# EAGLE board attsys (EAGLE 8.1.0)
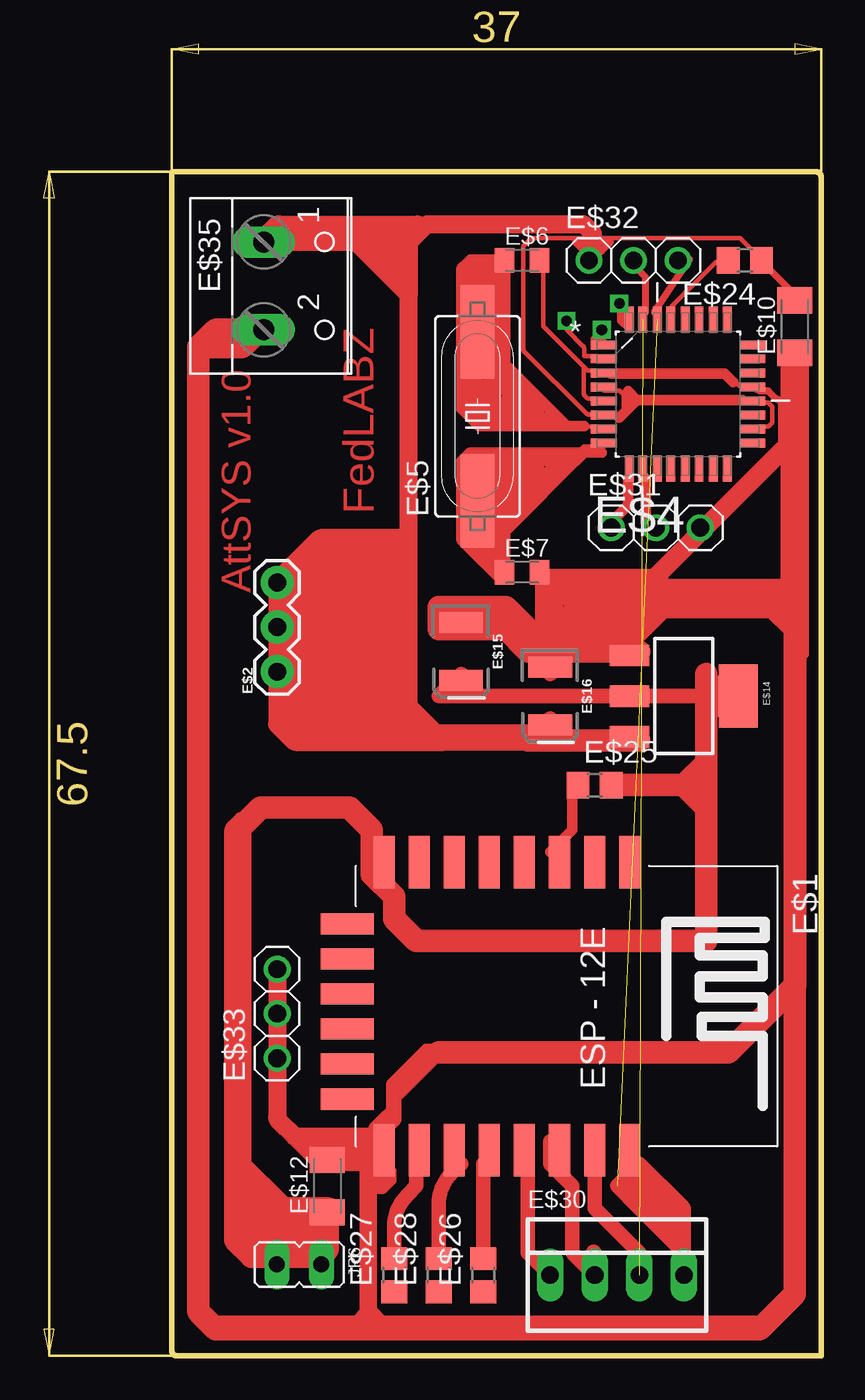
[diagram p0: board, top side]

Size 37 x 67.5 mm. Coordinates in mm from the lower left corner, seen from the top.
Outline: 0,67.5 36.75,67.5 arc-90 37,67.25 37,0 0.25,0 arc-90 0,0.25 0,67.5
Copper layers (1*16): Top 0.035mm / dielectric 1.5mm / Bottom 0.035mm
Design rules "default": minimum track width 10mil, minimum drill 24mil, track to track 8mil, track to pad 8mil, pad to pad 8mil, via to via 8mil, smd to smd 8mil, copper to edge 40mil, drill to drill 8mil, minimum pad ring 10mil, minimum via ring 8mil, stop-mask expansion 4mil, vias tented up to drill 0mil, thermal gap 10mil

## Footprints (pad centres in the part's own frame; a part is rotated, then mirrored left to right if it is on the bottom)
ESP12E-SMD = smd 3 x 1.2: ADC -8.3,3.8; CH_PD -8.3,1.8; GND 8.1,-8.2; GPIO0 8.1,-2.2; GPIO2 8.1,-4.2; GPIO4 8.1,-0.2; GPIO5 8.1,1.8; GPIO12 -8.3,-4.2; GPIO13 -8.3,-6.2; GPIO14 -8.3,-2.2; GPIO15 8.1,-6.2; GPIO16 -8.3,-0.2; RESET -8.3,5.8; RXD0 8.1,3.8; TXD0 8.1,5.8; VCC -8.3,-8.2 | smd 1.2 x 3: CS0 -4.8,-10.3; GPIO9 -0.8,-10.3; GPIO10 1.2,-10.3; MISO -2.8,-10.3; MOSI 3.2,-10.3; SCLK 5.2,-10.3
1X03 = drill 1.016 pad 1.88: 1 0,0; 2 2.54,0; 3 5.08,0
QFP80P900X900X120-32N = smd 1.473 x 0.508: 1 -4.242,2.794; 2 -4.242,2.007; 3 -4.242,1.194; 4 -4.242,0.406; 5 -4.242,-0.406; 6 -4.242,-1.194; 7 -4.242,-2.007; 8 -4.242,-2.794; 17 4.242,-2.794; 18 4.242,-2.007; 19 4.242,-1.194; 20 4.242,-0.406; 21 4.242,0.406; 22 4.242,1.194; 23 4.242,2.007; 24 4.242,2.794 | smd 0.508 x 1.473: 9 -2.794,-4.242; 10 -2.007,-4.242; 11 -1.194,-4.242; 12 -0.406,-4.242; 13 0.406,-4.242; 14 1.194,-4.242; 15 2.007,-4.242; 16 2.794,-4.242; 25 2.794,4.242; 26 2.007,4.242; 27 1.194,4.242; 28 0.406,4.242; 29 -0.406,4.242; 30 -1.194,4.242; 31 -2.007,4.242; 32 -2.794,4.242
HC49UP = smd 5.334 x 1.93: 1 -4.826,0; 2 4.826,0
C0805K = smd 1.1 x 1.4: 1 -1,0; 2 1,0
C1206K = smd 1.5 x 2: 1 -1.5,0; 2 1.5,0
SOT223 = smd 1.219 x 2.235: 1 -2.311,-3.099; 2 0,-3.099; 3 2.311,-3.099 | smd 3.6 x 2.2: 4 0,3.099
EIA3528 = smd 1.2 x 2.5: A 1.65,0; C -1.65,0
R0805 = smd 1.3 x 1.5: 1 -0.95,0; 2 0.95,0
22-23-2041 = drill 1 long: 1 -3.81,0; 2 -1.27,0; 3 1.27,0; 4 3.81,0
1X03' = drill 1.016: 1 -2.54,0; 2 0,0; 3 2.54,0
W237-102 = drill 1.194 long: 1 -2.5,-1.27; 2 2.5,-1.27
JP1 = drill 0.914 long: 1 0,-1.27; 2 0,1.27

## Placement (x,y rotation side)
DRILEGEND  [DRILEGEND]  -3.72,-6.76 0 top  (outside the outline)
E$1  [ESP12E-SMD]  20.29,19.83 270 top
E$2  [1X03]  6,39 90 top
E$4  [QFP80P900X900X120-32N]  28.85,54.83 0 top
E$5  [HC49UP]  17.42,53.56 90 top
E$6  [C0805K]  19.96,62.45 0 top
E$7  [C0805K]  19.96,44.67 0 top
E$10  [C1206K]  35.5,58.68 90 top
E$12  [C1206K]  8.86,9.67 90 top
E$14  [SOT223]  29.18,37.61 270 top
E$15  [EIA3528]  16.48,40.15 270 top
E$16  [EIA3528]  21.56,37.61 270 top
E$24  [R0805]  32.66,62.45 180 top
E$25  [R0805]  24.1,32.53 0 top
E$26  [R0805]  17.75,4.59 90 top
E$27  [R0805]  12.67,4.59 90 top
E$28  [R0805]  15.21,4.59 90 top
E$30  [22-23-2041]  25.37,4.59 0 top
E$31  [1X03']  27.58,47.21 0 top
E$32  [1X03']  26.31,62.45 0 top
E$33  [1X03']  6,19.5 90 top
E$35  [W237-102]  6.5,61 270 top
JP6  [JP1]  7.25,5.2 270 top

## Library data of the parts
DRILEGEND = drilegend
E$1 = esp8266modules
E$2 = SparkFun-Electromechanical
E$4 = Atmel-ATMEGA328P-AU
E$5-E$7 E$10 E$12 E$31-E$33 = adafruit
E$14 = SparkFun-IC-Power
E$15 E$16 = SparkFun-Capacitors
E$24-E$28 = eagle-ltspice
E$30 = con-molex
E$35 = con-wago-500
JP6 = jumper

## Nets
S$1: E$26.1
S$2: E$14.4
S$3: E$1.GPIO15
S$4: E$1.GPIO2
S$5: E$1.GPIO0
S$6: E$25.1
S$7: E$27.1
S$8: E$1.VCC
S$9: E$15.C
S$10: E$1.GND
S$11: E$27.2
S$12: E$28.2
S$13: E$28.1
S$14: E$1.CH_PD
S$15: E$15.A
S$16: E$14.2
S$17: E$25.2
S$18: E$16.C
S$26: E$30.1
S$29: E$4.30 E$30.4
S$31: E$4.8 E$5.1 E$7.1
S$32: E$4.7 E$5.2 E$6.1
S$33: E$4.3 E$4.5 E$4.21 E$6.2 E$7.2
S$34: E$4.4 E$4.6 E$4.18 E$4.20 E$24.1
S$35: E$4.29 E$24.2
S$36: E$4.31 E$30.3
S$37: E$30.2
VCC: JP6.1 JP6.2

## Tracks (layer width: path | path; a pad name or v marks a point on that pad's centre or on a via)
S$1
  Top 0.254: 17.75,3.57 E$26.1
S$2
  Top 0.254: 32.15,37.63 E$14.4
S$3
  Top 0.254: 13.86,10.89 13.86,11.57 E$1.GPIO15
S$4
  Top 0.254: 15.92,11.57 E$1.GPIO2
S$5
  Top 0.254: 17.75,11.35 17.98,11.57 E$1.GPIO0
S$6
  Top 0.254: 23.01,32.38 E$25.1
S$7
  Top 0.254: 12.72,3.57 E$27.1 12.49,3.8
S$8
  Top 0.254: 12.26,28.95 12.26,28.26 E$1.VCC 12.26,28.03 12.26,27.35
S$9
  Top 0.254: 16.61,41.75 E$15.C 16.38,41.75
S$10
  Top 0.254: 12.03,11.57 E$1.GND 12.03,11.8
S$11
  Top 0.254: 12.72,5.63 E$27.2
S$12
  Top 0.254: 15.23,5.63 E$28.2
S$13
  Top 0.254: 15.23,3.8 E$28.1
S$14
  Top 0.254: 22.09,28.26 E$1.CH_PD
S$15
  Top 0.254: 16.61,38.32 E$15.A 16.38,38.32
S$16
  Top 0.254: 25.98,37.41 E$14.2 26.21,37.63
S$17
  Top 0.254: 24.84,32.61 E$25.2
S$18
  Top 0.254: 21.64,39.46 E$16.C 21.41,39.46
S$19
  Top 0.61: 21.56,28.72 22.76,29.92 arc45 22.83,30.09 22.83,32.53
S$20
  Top 0.813: 25.37,37.61 16.48,37.61 | 16.48,37.61 16.48,38.88 15.21,37.61 16.48,37.61
S$21
  Top 0.813: 25.37,35.07 21.56,35.07 | 21.56,35.07 21.56,36.34 20.29,35.07 21.56,35.07
  Top 1.27: 20.29,35.07 25.37,35.07 26.64,35.07
S$22
  Top 0.813: 26.64,37.61 30.45,37.61 | 30.45,37.61 31.72,37.61 | 31.72,37.61 30.45,38.88 30.45,37.61 | 30.45,37.61 30.45,36.34 | 30.45,36.34 31.72,37.61 | 30.45,36.34 30.45,33.8
  Top 1.27: 30.45,38.88 30.45,33.8 | 29.18,32.53 30.45,31.26 | 30.45,31.26 30.45,23.64 13.94,23.64 12.67,24.91 12.67,26.18 11.4,27.45 11.4,29.99 10.2,31.19 arc45 10.03,31.26 5.05,31.26 3.78,29.99 3.78,10.94 6.25,8.47 arc45 6.42,8.4 8.86,8.4 | 25.37,32.53 29.18,32.53 | 29.18,32.53 30.45,33.8 | 30.45,33.8 30.45,31.26
S$23
  Top 0.813: 13.94,10.94 13.94,9.67 13.41,9.14 arc45 12.67,7.35 12.67,5.86
S$24
  Top 0.813: 16.48,10.94 15.95,10.41 arc45 15.21,8.62 15.21,5.86
S$25
  Top 0.813: 17.75,10.94 17.75,5.86
S$26
  Top 0.813: 20.29,10.94 20.29,5.86 E$30.1
S$27
  Top 0.406: 27,59.5 27,61.4 arc45 26.93,61.57 26,62.5
S$28
  Top 0.813: 24.1,10.94 24.1,8.4 26.64,5.86
S$29  (1 unrouted)
  Top 0.813: 27.84,9.74 27.91,9.67 | 27.91,9.67 29.11,8.47 arc-45 29.18,8.29 29.18,7.13 | 29.18,7.13 29.18,5.86 | 29.18,5.86 E$30.4 | 26.64,10.94 25.37,9.67 | 25.37,9.67 26.64,8.4 | 26.64,8.4 26.71,8.33 | 29.18,5.86 27.91,7.13 | 27.91,7.13 27.84,7.2 | 26.71,8.33 arc-45 26.64,8.51 26.64,9.67 | 26.64,9.67 26.64,10.94 | 26.64,10.94 27.84,9.74 | 27.84,9.74 arc-45 27.91,9.56 27.91,8.4 | 27.91,8.4 27.91,7.13 | 27.91,7.13 29.18,8.4 27.91,8.4 | 27.91,8.4 26.64,8.4 | 26.64,8.4 27.91,9.67 | 27.91,9.67 26.64,9.67 | 26.64,9.67 25.37,9.67 | 26.71,8.33 27.84,7.2 | 27.84,7.2 arc45 28.02,7.13 29.18,7.13 | 29.18,7.13 27.91,8.4
S$30
  Top 0.813: 25.37,40.15 22.94,40.15 arc45 22.76,40.08 21.56,38.88 | 21.56,38.88 21.56,40.05 | 21.56,40.05 arc45 21.49,40.22 | 21.49,40.22 20.29,41.42 | 20.29,41.42 19.02,42.69 | 19.02,42.69 17.75,42.69 | 17.75,42.69 17.64,42.69 | 17.64,42.69 arc-45 17.82,42.62 19.02,41.42 | 20.29,41.42 20.29,40.15 21.56,38.88 | 20.29,41.42 19.02,41.42 | 19.02,42.69 19.02,41.42 | 16.48,42.69 17.75,41.42 | 21.49,40.22 21.56,40.15 | 21.56,40.15 21.56,40.05 | 21.56,40.15 22.83,40.15 | 16.48,42.69 15.21,42.69 16.48,41.42 16.48,42.69 | 16.48,42.69 17.64,42.69 | 17.75,42.69 17.75,41.42 | 17.75,41.42 19.02,41.42 | 15.21,17.29 12.67,14.75 12.67,13.48 11.4,12.21 | 11.4,12.21 10.13,10.94 | 10.13,10.94 8.86,10.94 | 10.13,10.94 11.4,10.94 11.4,12.21
  Top 1.27: 26.64,40.15 25.37,40.15 | 25.37,40.15 21.56,40.15 | 21.56,40.15 19.02,42.69 15.21,42.69 15.21,41.42 19.02,41.42 20.29,40.15 21.56,40.15 | 25.37,40.15 27.91,42.69 34.26,42.69 35.53,41.42 35.53,21.1 31.72,17.29 15.21,17.29
S$31
  Top 0.254: 18.89,47.26 18.89,44.75 E$7.1 | E$5.1 18.89,47.26 | 18.89,47.26 23.47,51.83 24.61,51.83 E$4.8
S$32
  Top 0.254: E$6.1 18.89,62.35 18.89,59.83 17.52,58.46 E$5.2 17.52,58.23 22.78,52.98 24.61,52.98 E$4.7
S$33
  Top 0.254: 23.47,56.41 23.69,56.18 24.61,56.18 E$4.3 24.61,55.95 31.69,55.95 32.38,55.26 33.07,55.26 E$4.21 33.3,55.03 33.98,55.03 34.67,54.35 34.67,52.06 27.35,44.75 21.18,44.75 E$7.2 | 23.47,56.41 21.18,58.69 21.18,62.35 E$6.2 | 23.47,56.41 23.47,54.8 23.69,54.58 24.61,54.58 E$4.5
S$34
  Top 0.254: E$4.18 33.3,52.98 33.98,52.98 34.21,53.2 34.21,54.12 33.98,54.35 33.3,54.35 E$4.20 33.07,54.58 25.75,54.58 | 24.61,53.66 25.52,53.66 25.75,53.89 25.75,54.58 | 25.75,54.58 25.75,54.8 25.52,55.03 24.61,55.03 E$4.4 | 24.61,53.66 23.69,53.66 20.04,57.32 20.04,63.26 20.49,63.72 32.38,63.72 33.52,62.58 E$24.1 | 24.61,53.66 E$4.6
S$35
  Top 0.254: E$4.29 28.49,59.15 28.49,59.83 31.01,62.35 31.69,62.35 E$24.2
S$36  (1 unrouted)
S$37
  Top 0.813: 24.03,5.93 arc-45 24.1,5.75 E$30.2 22.9,5.79 arc-45 22.83,5.96 22.83,9.67 21.56,10.94 21.56,12.21
S$38
  Top 0.406: 27.5,59.5 29.5,62.5 28.5,62.5
S$39
  Top 0.61: 16,17.5 14.5,17.5 12.57,15.57 arc45 12.5,15.39 12.5,14 | 12.5,14 12.5,13.5 12,13.5 | 12,13.5 11.57,13.07 arc45 11.5,12.89 11.5,12.5 11.93,12.93 arc45 12,13.11 12,13.5 | 12,13.5 12.5,14
S$40
  Top 0.406: 34,62.5 34,62.1 arc45 34.07,61.93 35.5,60.5
S$41
  Top 0.61: 25.5,53.5 26.5,54.5 | 26.5,54.5 32.5,54.5 | 26.5,54.5 26,54.5 | 26.5,54.5 26,55
S$43
  Top 0.61: 19,61.6 19,59.5 | 18,58.5 19,59.5 | 19,59.5 19,56.6 arc45 19.07,56.43 19.57,55.93 | 22,53.5 22.5,53 | 22.5,53 23.5,53 | 22.5,53 18,53 | 18,53 17.5,53 16.5,54 16.5,54.6 | 16.5,55 16.5,61.5 | 16.5,61.5 16.5,61.9 arc-45 16.57,62.07 17,62.5 19,62.5 19,61.6 | 19,61.6 arc-45 18.93,61.43 18.5,61 | 18.5,61 17.11,61 arc-45 16.93,61.07 16.5,61.5 | 16.5,61.5 17,62 18.5,62 18.5,61.5 17,61.5 | 18.5,57.1 18.5,56.5 | 18.5,61 18.5,57.1 | 18.5,57.1 arc-45 18.43,56.93 16.5,55 | 16.5,55 16.5,54.6 | 16.5,54.6 arc45 16.57,54.43 18,53 | 18,53 18,54 | 18,55.4 arc-45 18.07,55.57 | 18.07,55.57 18.5,56 | 18.5,56 19.39,56 arc-45 19.57,55.93 | 19.57,55.93 22,53.5 | 22,53.5 20.39,53.5 | 19,53.5 18.11,53.5 arc-45 17.93,53.57 16.5,55 | 16.5,55 16.89,55 arc45 17.07,55.07 17.5,55.5 17.5,54.5 | 17.5,54.5 17,55 | 17.5,54.5 18,54 | 18,54 18,54.6 | 18,55 18,55.4 | 18,55.4 arc-45 18.07,55.57 | 18.5,56 19,56.5 19,56.1 arc-45 18.93,55.93 18,55 | 18,55 18,54.6 | 18,54.6 arc45 18.07,54.43 19,53.5 | 19,53.5 19.5,53.5 | 19.89,53.5 20.39,53.5 | 20.39,53.5 arc45 20.57,53.57 21,54 19.5,55.5 19,55.5 | 19,55.5 18.5,55 18.5,54.6 arc45 18.57,54.43 19.5,53.5 | 19.5,53.5 19.89,53.5 | 19.89,53.5 arc45 20.07,53.57 20.5,54 19,55.5 | 19,55.5 19,55.1 arc45 19.07,54.93 20,54 19.5,54 19,54.5
S$44
  Top 0.61: 25,56 31.5,56 32,55.5
S$45
  Top 0.61: 24.5,51.5 23.61,51.5 arc45 23.43,51.43 19,47 18.5,47 18.5,45.1 arc45 18.57,44.93 19,44.5 19,46.9 arc45 18.93,47.07 18.5,47.5
S$46
  Top 0.61: 18,49.5 18,51 19,51 | 21.39,51 22.89,51 arc45 23.07,51.07 23.5,51.5 17.11,51.5 arc45 16.93,51.43 16.5,51 16.5,46.6 arc45 16.57,46.43 18.5,44.5 18.5,45 | 18.5,45 18.5,45.4 arc45 18.43,45.57 18,46 18,45.6 arc45 18.07,45.43 | 18.07,45.43 18.5,45 | 18.07,45.43 17.5,46 17.5,49.4 arc-45 17.57,49.57 19,51 | 19,51 19.5,51 | 20.39,51 21.39,51 | 21.39,51 arc-45 21.57,50.93 22,50.5 19,47.5 18,48.5 19,48.5 | 19,48.5 19.39,48.5 arc45 19.57,48.57 | 19.57,48.57 21.5,50.5 | 19.57,48.57 19,48 19,48.4 arc45 18.93,48.57 18,49.5 | 18,49.5 18.5,50 | 18.5,50 19.5,51 | 19.5,51 20.39,51 | 20.39,51 arc-45 20.57,50.93 21,50.5 19.5,49 18.5,50 | 18.5,50 18.5,49.1 arc45 18.57,48.93 19,48.5 | 19,48.5 19,49.9 arc-45 19.07,50.07 19.5,50.5 | 19.5,50.5 20.5,50.5 19.5,49.5 19.5,50.5
S$47
  Top 0.61: 26,50 26,48.6 arc-45 25.93,48.43 25,47.5
S$48
  Top 0.61: 27,50 27,47.6 arc45 27.07,47.43 27.5,47
S$49  (via drill 0.6)
  Top 0.254: 25.5,59 26,58.5 26,59 | 26,59 26,59.4 arc45 25.93,59.57 v25.5,60 | v25.5,60 25.5,59.6 arc45 25.57,59.43 26,59 | 26,59 25.5,59 | v25.5,60 25.5,59.5 | 25.5,59.5 25.5,59 | 25.5,59 26,59.5 25.5,59.5
S$50  (via drill 0.6)
  Top 0.254: v24.5,58.5 24.5,58 | 24.5,58 24.5,57.5 | 24,58 v24.5,58.5 | v24.5,58.5 24.5,58.1 arc45 24.57,57.93 25,57.5 | 24,58 24,57.5 24.5,58 | 24,58 24.5,58
S$51
  Top 1.016: 9,8.5 9,6.11 arc-45 8.93,5.93 8.5,5.5 4.61,5.5 arc-45 4.43,5.57 3.5,6.5 3.5,29.89 arc-45 3.57,30.07 4,30.5 4,9.61 arc45 4.07,9.43 6.5,7 7.39,7 arc45 7.57,7.07 8,7.5 | 8,7.5 7.5,7.5 7.39,7.5 | 7,7.5 7.39,7.5 | 7.39,7.5 arc-45 7.57,7.43 8.5,6.5 7.5,6.5 | 7.5,6.5 5.61,6.5 arc-45 5.43,6.57 4.5,7.5 | 4.07,7.93 4,8 4,7.11 arc45 4.07,6.93 5,6 6.89,6 arc45 7.07,6.07 7.5,6.5 | 4,9 4,8.11 arc45 4.07,7.93 | 4.07,7.93 4.5,7.5 | 4.5,7.5 5,8 5,7.11 arc45 5.07,6.93 5.5,6.5 5.5,6.89 arc-45 5.57,7.07 6.5,8 | 8,7.5 8.5,7.5
S$52  (via drill 0.6)
  Top 0.254: 24.5,57 23.5,57 23.5,57.4 arc45 23.43,57.57 22.5,58.5 v22.5,59
S$53
  Top 0.61: 10.5,11.5 9.5,11.5
  Top 1.016: 6,22 6,13.61 arc45 6.07,13.43 7,12.5 | 7,12.5 7.5,12 | 8.5,11 7.5,12 | 7.5,12 11.11,12 | 11.5,12 11.11,12 | 11.11,12 arc45 10.93,11.93 10.5,11.5 | 7,12.5 11.39,12.5 arc45 11.57,12.57 12,13 12,12
S$54
  Top 0.406: 24,62.5 24,63 24,63.5 | 24,63.5 23.5,63.5 | 23.5,63.5 23,63.5 24,62.5 | 24,62.5 24.5,63 | 24.5,63 25,63.5 24,63.5 | 24,63.5 24.5,63 | 24.5,63 24.11,63 arc-45 23.93,63.07 23.5,63.5
  Top 1.016: 6,44 6,36 6.93,35.07 arc45 7.11,35 15.5,35 15.43,35.07 | 24,63 24,63.9 arc45 23.93,64.07 23.5,64.5 14.61,64.5 arc45 14.43,64.43 13.5,63.5 13.5,60.5 | 13.5,37.1 arc45 13.57,36.93 | 13.57,36.93 15,35.5 | 15,35.5 21.5,35.5 21,35 15.61,35 arc-45 15.43,35.07 | 15.43,35.07 15,35.5 | 13.57,36.93 arc-45 13.5,37.1 | 13.5,37.1 13.5,60.5 | 13.5,60.5 10.57,63.43 arc45 10.39,63.5 5,63.5 5.93,64.43 arc-45 6.11,64.5 14,64.5 13.07,63.57 arc45 13,63.4 13,63 | 13,63 13,61.5 12,62.5 | 12,62.5 11.07,63.43 arc-45 11,63.6 11,64 11.43,63.57 arc45 11.61,63.5 13,63.5 12.43,62.93 | 12,62.5 12.43,62.93 | 12.43,62.93 arc-45 12.61,63 13,63
  Top 1.27: 6,44 8.43,46.43 arc-45 8.61,46.5 13,46.5 13,36 13.43,35.57 arc45 13.61,35.5 14,35.5 13.57,35.93 arc45 13.39,36 12.5,36 | 12.5,36 7,36 7,44 8.43,45.43 arc-45 8.61,45.5 12.5,45.5 12.5,36 | 12.5,36 11.57,36.93 arc45 11.39,37 8,37 8,43.5 8.93,44.43 arc-45 9.11,44.5 12,44.5 12,38 9,38 8.57,38.43 arc-45 8.5,38.6 8.5,43.5 11,43.5 10.07,42.57 arc-45 9.89,42.5 9.5,42.5 9.5,38.5 9.93,38.93 arc-45 10.11,39 11,39 11.43,39.43 arc45 11.5,39.6 11.5,43 10.57,42.07 arc45 10.5,41.9 10.5,40
S$55
  Top 0.254: 34.5,54.5 35,54
  Top 0.305: 12,11.5 11.5,11 | 11.07,10.57 arc45 11,10.39 | 11,2 11,1.5 11.43,1.93 arc45 11.5,2.1 11.5,2.5 11.5,9.5 | 11.5,10 11.5,10.5
  Top 0.406: 21.5,44.5 27.39,44.5 arc45 27.57,44.57 35,52 35,54 35,54.5 | 35.5,57.5 35.5,57 35.5,56.5 35.5,55.1 arc-45 35.43,54.93 35,54.5 | 35,54.5 34.61,54.5 arc-45 34.43,54.57 34,55 33.5,55 | 11.07,10.57 arc45 11,10.39 | 11,2 11.43,2.43 arc45 11.5,2.6 11.5,9.5 11.5,10 11.5,11
  Top 0.61: 12.5,10.5 12.5,10 12.07,9.57 arc-45 11.89,9.5 11.5,9.5 11.93,9.93 arc45 12,10.11 12,10.5 11.5,10 | 34.93,51.43 arc45 35,51.6 35,52 35,54.5 35,57 35.5,56.5 | 34.93,51.43 28,44.5 | 28,44.5 21,44.5 21,44 | 21,44 21,43.5 | 21,43.5 21,40.5 24.89,40.5 arc45 25.07,40.57 25.5,41 | 26.93,42.43 28,43.5 28,44.5 | 34.93,51.43 35,51.5 35,44 | 35,44 35,43 | 35,43 35,42.1 arc45 35.07,41.93 35.5,41.5 35.5,55.9 arc-45 35.57,56.07 36,56.5 36,40 | 11.5,11 11.07,10.57 arc45 11,10.39 11,2.5 | 11,2.5 11,2 12,2 | 34,2 12,2 | 12,2 11.5,2.5 11,2.5 | 11,2.5 10.5,2 10.57,1.93 | 11,1.5 10.57,1.93 | 10.57,1.93 arc45 10.39,2 2.5,2 1.57,2.93 arc-45 1.5,3.1 1.5,3.5 | 21,44 35,44 | 35,44 34.57,43.57 arc-45 34.39,43.5 | 34.39,43.5 28.5,43.5 | 28.5,43.5 28.93,43.07 arc45 29.11,43 | 29.11,43 30,43 35,43 | 35,43 34.57,43.43 arc45 34.39,43.5 | 28.5,43.5 27,43.5 | 27,43.5 22,43.5 | 22,43.5 21,43.5 | 21,43.5 21.43,43.07 arc-45 21.5,42.9 21.5,41.5 | 21.5,41.5 21.5,41 25.5,41 | 25.5,41 26.07,41.57 | 26.5,42 26.93,42.43 | 26.93,42.43 arc45 27,42.6 27,43.5 | 27,43.5 26.57,43.07 arc45 26.5,42.9 26.5,42 | 26.5,42 26.07,41.57 | 26.07,41.57 arc-45 25.89,41.5 21.5,41.5 | 21.5,41.5 21.93,41.93 arc45 22,42.1 22,43.5 | 22,43.5 22.43,43.07 arc45 22.61,43 26,43 26,42 22,42 22.43,42.43 arc-45 22.61,42.5 25.5,42.5 25.93,42.93 arc-45 26.11,43 29.11,43
  Top 1.27: 35.5,57 35.5,3.5 34,2 33.57,1.57 arc-45 33.39,1.5 11,1.5 2.5,1.5 1.57,2.43 arc-45 1.5,2.6 1.5,3.5 1.5,57.5 2.43,58.43 arc-45 2.61,58.5 5,58.5 4.07,57.57 arc-45 3.89,57.5 2,57.5

## Text on the board
Top: FedLABZ | AttSYS v1.0